# EAGLE board project121 (EAGLE 6.5.0)
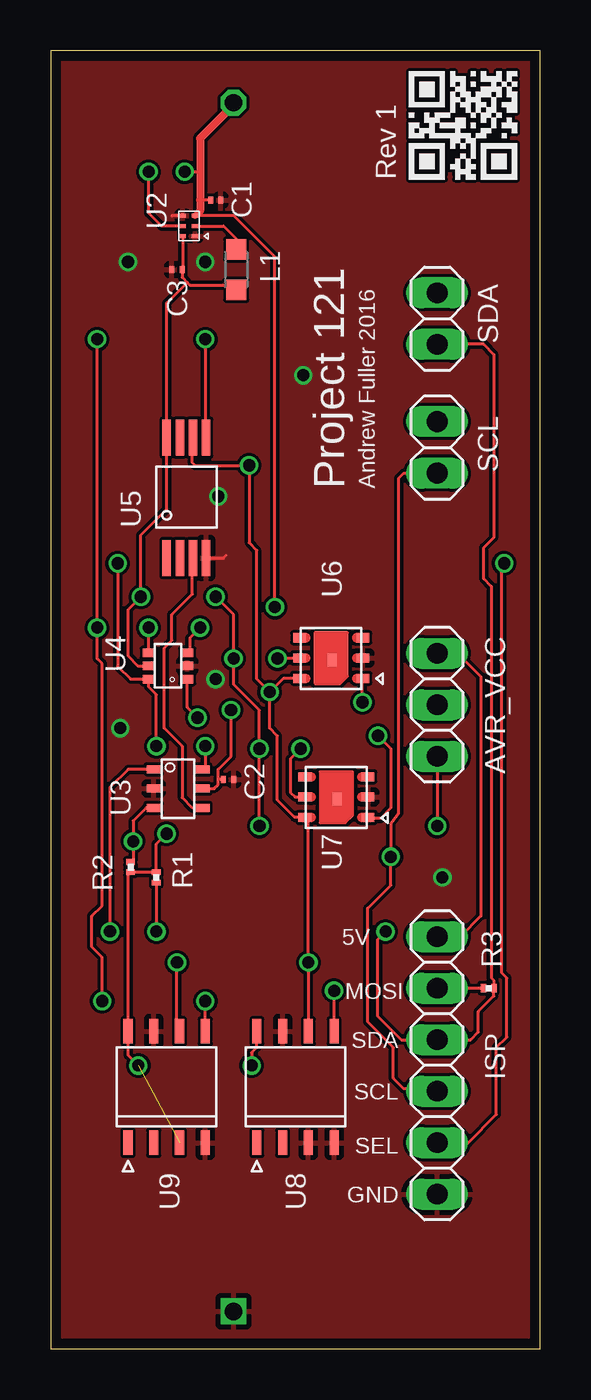
[diagram p0: board, top side]
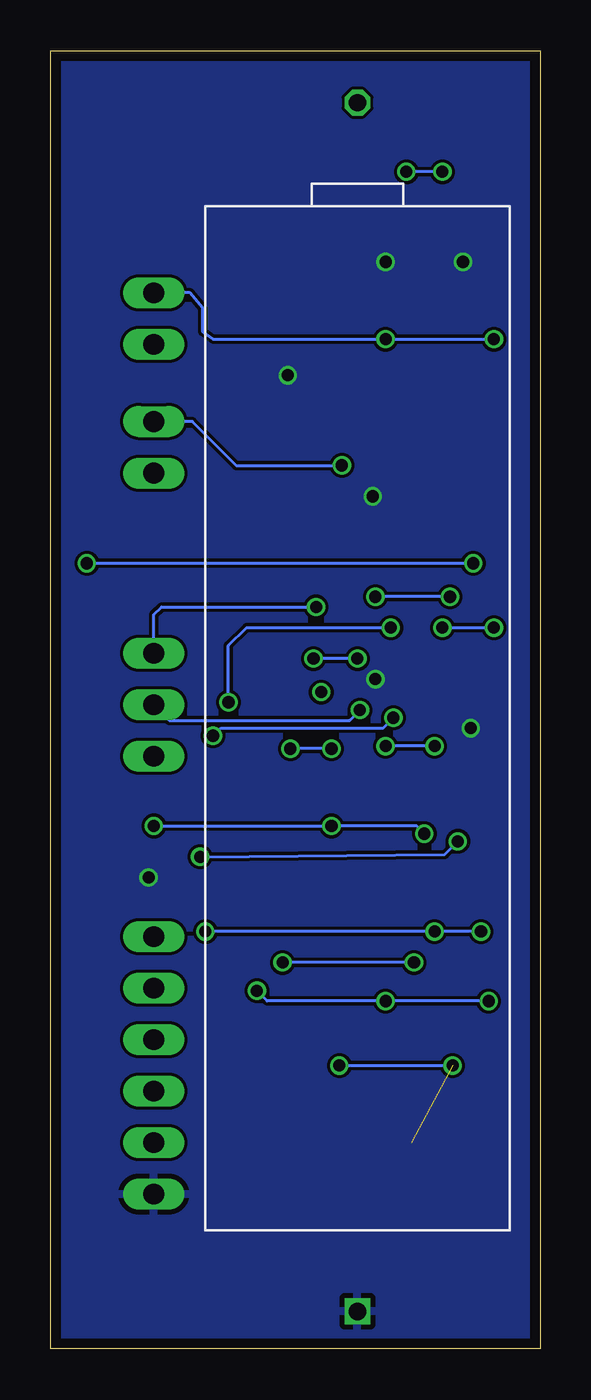
[diagram p1: board, bottom side, seen from below]

Size 24.13 x 64.01 mm. Coordinates in mm from the lower left corner, seen from the top.
Outline: 0,0 24.13,0 24.13,64.01 0,64.01 0,0
Copper layers (1*16): Top 0.035mm / dielectric 1.6mm / Bottom 0.035mm
Design rules "Elecrow_2-layer_PCB_eagle_rule": minimum track width 6mil, minimum drill 12mil, track to track 6mil, track to pad 6mil, pad to pad 6mil, via to via 8mil, smd to smd 0mil, copper to edge 20mil, drill to drill 10mil, minimum pad ring 6mil, minimum via ring 6mil, stop-mask expansion 0mil, vias tented up to drill 100mil, thermal gap 10mil

## Footprints (pad centres in the part's own frame; a part is rotated, then mirrored left to right if it is on the bottom)
1X03 = drill 1.016 long: 1 -2.54,0; 2 0,0; 3 2.54,0
C0201 = smd 0.25 x 0.35: 1 -0.25,0; 2 0.25,0
1X06 = drill 1.016 long: 1 -6.35,0; 2 -3.81,0; 3 -1.27,0; 4 1.27,0; 5 3.81,0; 6 6.35,0
L2012C = smd 1 x 1: 1 -1,0; 2 1,0
R0201 = smd 0.28 x 0.43: 1 -0.255,0; 2 0.255,0
1X02 = drill 1.016 long: 1 -1.27,0; 2 1.27,0
TPS62230DRYT = smd 0.2 x 0.3: EN 0.5,0.6; FB 0,0.6; GND 1,0.6; MODE 0,0; SW 0.5,0; VIN 1,0
ATTINY4 = smd 0.7 x 0.4: GND 0,0.95; PB0 0,1.9; PB1 0,0; PB2 2.4,0; PB3 2.4,1.9; VCC 2.4,0.95
74LVC1G3157 = smd 0.42 x 0.6: A 1.3,1.9; B0 1.3,0; B1 0,0; GND 0.65,0; S 0,1.9; VCC 0.65,1.9
PCA8565TS = smd 0.42 x 1.78: /INT 0.665,-2.92; CLKOUT 0.015,3.02; OSCI -0.635,-2.92; OSCO 0.015,-2.92; SCL 0.665,3.02; SDA 1.315,3.02; VDD -0.635,3.02; VSS 1.315,-2.92
SI7051-A20-IM = smd 0.625 x 0.45: GND -1.673,0.23; NC@3 -1.673,-0.77; NC@4 1.452,-0.77; SCL 1.452,1.23; SDA -1.673,1.23; VDD 1.452,0.23 | smd 0.45 x 0.625: PAD -0.16,0.33
M24M02-A124 = smd 1.2 x 0.45: E2 0,1.27; NC@1 0,3.81; NC@2 0,2.54; SCL 5.5,1.27; SDA 5.5,0; VCC 5.5,3.81; VSS 0,0; WC 5.5,2.54
TLH-5903/P = drill 0.85 octagon: ANODE 7.5,55.6 | drill 0.85 square: CATHODE 7.5,-4

## Placement (x,y rotation side)
AVR_VCC  [1X03]  19.05,31.75 270 top
C1  2.2uF  [C0201]  8.13,56.64 0 top
C2  1uF  [C0201]  8.76,28.07 0 top
C3  2.2uF  [C0201]  6.22,53.21 180 top
ISP  [1X06]  19.05,13.97 270 top
L1  2.2uH  [L2012C]  9.14,53.21 270 top
R1  2.2k  [R0201]  5.21,23.24 90 top
R2  2.2k  [R0201]  3.94,23.75 270 top
R3  2.2k  [R0201]  21.59,17.78 0 top
SCL  [1X02]  19.05,44.45 90 top
SDA  [1X02]  19.05,50.8 90 top
U2  TPS62230DRYT  [TPS62230DRYT]  7.11,54.86 90 top
U3  ATTINY4  [ATTINY4]  5.08,26.67 0 top
U4  74LVC1G3157  [74LVC1G3157]  6.73,33.02 90 top
U5  PCA8565TS  [PCA8565TS]  6.35,41.91 0 top
U6  SI7051-A20-IM  [SI7051-A20-IM]  13.72,34.29 180 top
U7  SI7051-A20-IM  [SI7051-A20-IM]  13.97,27.43 180 top
U8  M24M02-A125  [M24M02-A124]  13.97,10.16 90 top
U9  M24M02-A125  [M24M02-A124]  7.62,10.16 90 top
U$1  TLH-5903/P  [TLH-5903/P]  16.51,5.84 0 bottom

## Library data of the parts
AVR_VCC ISP SCL SDA = pinhead
C1-C3 L1 R1-R3 = rcl
U2-U9 U$1 = project121

## Nets
GND: C1.2 C2.2 C3.2 ISP.6 U2.GND U2.MODE U3.GND U4.GND U5.VSS U6.GND U7.GND U8.E2 U8.VSS U8.WC U9.VSS U9.WC U$1.CATHODE
INT: U3.PB2 U5./INT
MOSI: ISP.2 R3.1
N$2: L1.1 U2.SW
SCL: SCL.2 U5.SCL U6.SCL U7.SCL U8.SCL U9.SCL
SCL_PRG: ISP.4 R2.1 SCL.1 U3.PB1
SDA: SDA.2 U4.A U5.SDA U8.SDA U9.SDA
SDA0: U4.B0 U6.SDA
SDA1: U4.B1 U7.SDA
SDA_PRG: ISP.3 R1.1 R3.2 SDA.1 U3.PB0
SDA_SEL: ISP.5 U3.PB3 U4.S
VCC_2V5: AVR_VCC.3 C3.1 L1.2 R1.2 R2.2 U2.FB U4.VCC U5.VDD U6.VDD U7.VDD U8.VCC U9.E2 U9.VCC
VCC_5V: AVR_VCC.1 C1.1 ISP.1 U2.EN U2.VIN U$1.ANODE
VCC_ATTINY: AVR_VCC.2 C2.1 U3.VCC

## Tracks (layer width: path | path; a pad name or v marks a point on that pad's centre or on a via)
GND  (via drill 0.6)
  Top 0.152: U5.VSS 8.51,38.99 8.64,39.12 | U2.GND 5.99,55.86 5.97,55.88
  other vias: 8.13,33.02 19.3,23.24 3.43,30.61 7.62,53.59 8.26,42.04 3.81,53.59 12.45,48.01
  pour Bottom: 0,64.01 0,0 24.13,0 24.13,64.01
  pour Top: 0,64.01 0,0 24.13,0 24.13,64.01
INT
  Top 0.152: 6.86,38.83 6.99,38.96 | U3.PB2 6.99,26.67 6.48,27.18 6.48,29.72 5.59,30.61 5.59,34.54 5.97,34.92 5.97,36.2 6.99,37.21 6.99,38.96 | 6.99,38.96 U5./INT
MOSI
  Top 0.152: R3.1 ISP.2
N$2
  Top 0.152: 7.12,55.37 U2.SW 8.52,55.36 9.14,54.74 L1.1
SCL  (via drill 0.6)
  Top 0.152: U9.SCL 6.22,15.79 v6.22,19.05 | U8.SCL v12.7,19.05 12.7,26.02 U7.SCL 12.03,26.2 11.18,27.05 11.18,30.23 10.79,30.61 v10.79,32.38 | 7.11,44.83 U5.SCL | 6.99,44.96 U5.SCL | U5.SCL 6.99,44.9 6.99,43.69 7.11,43.56 v9.78,43.56 9.78,39.75 10.16,39.37 10.16,33.02 v10.79,32.38 | U6.SCL 11.47,33.06 v10.79,32.38
  Bottom 0.152: v6.22,19.05 v12.7,19.05 | v9.78,43.56 14.99,43.56 17.14,45.72 SCL.2
SCL_PRG  (via drill 0.6)
  Top 0.152: U3.PB1 4.7,26.67 4.06,26.04 v4.06,25.02 4.06,24.13 R2.1 | ISP.4 18.92,12.83 17.4,12.83 16.89,13.34 16.89,14.86 15.62,16.13 15.62,21.72 16.76,22.86 v16.76,24.26 16.76,25.91 17.14,26.42 17.14,42.93 17.4,43.18 SCL.1
  Bottom 0.152: v4.06,25.02 4.7,24.38 v16.76,24.26
SDA  (via drill 0.6)
  Top 0.152: U9.SDA v7.62,17.14 | U8.SDA v13.97,17.65 | v2.29,49.78 v2.29,35.56 2.29,34.04 2.54,33.78 2.54,21.84 2.03,21.34 2.03,19.81 2.54,19.3 v2.54,17.14 | U4.A 4.83,35.43 v4.83,35.56 | v7.62,49.78 7.62,44.98 U5.SDA
  Bottom 0.152: v2.54,17.14 v7.62,17.14 13.46,17.14 v13.97,17.65 | v4.83,35.56 v2.29,35.56 | v2.29,49.78 v7.62,49.78 16.13,49.78 16.64,50.16 16.64,51.31 17.27,52.07 SDA.2
SDA0  (via drill 0.6)
  Top 0.152: 6.83,34.42 U4.B0 6.86,34.45 6.86,35.05 v7.37,35.56 | v15.37,31.88 15.37,33.04 U6.SDA
  Bottom 0.152: v15.37,31.88 15.37,34.67 14.48,35.56 v7.37,35.56
SDA1  (via drill 0.6)
  Top 0.152: 6.86,32.89 U4.B1 6.73,31.62 v7.24,31.11 | U7.SDA 15.68,26.16 16.26,26.16 16.76,26.67 16.76,29.59 v16.13,30.23
  Bottom 0.152: v16.13,30.23 15.75,30.61 7.75,30.61 v7.24,31.11
SDA_PRG  (via drill 0.6)
  Top 0.152: U3.PB0 3.81,28.57 2.92,27.69 v2.92,20.57 | R3.2 | R3.2 21.84,18.16 21.72,18.29 21.72,37.59 21.34,37.97 21.34,39.5 21.84,40.01 21.84,49.02 21.34,49.53 SDA.1 | R1.1 v5.21,20.57 | R3.2 21.84,17.4 21.08,16.64 21.08,15.62 20.7,15.24 ISP.3 17.27,15.24 16.13,16.38 16.13,20.19 v16.51,20.57
  Bottom 0.152: v16.51,20.57 v5.21,20.57 v2.92,20.57
SDA_SEL  (via drill 0.6)
  Top 0.152: ISP.5 20.57,10.16 21.97,11.56 21.97,14.86 22.48,15.37 22.48,18.29 22.23,18.54 22.23,38.61 v22.35,38.73 | v7.62,29.72 7.62,28.71 U3.PB3 | v3.3,38.73 3.3,33.66 3.94,33.02 U4.S 4.83,32.63 5.21,32.26 v5.21,29.72
  Bottom 0.152: v5.21,29.72 v7.62,29.72 | v22.35,38.73 v3.3,38.73
VCC_2V5  (via drill 0.6)  (1 unrouted)
  Top 0.152: U9.VCC 3.94,15.53 | U9.VCC 3.81,23.37 R2.2 R1.2 5.21,24.89 v5.71,25.4 | v8.13,37.08 9.02,36.2 v9.02,34.04 9.02,32.77 10.29,31.5 v10.29,29.59 v10.29,25.78 | v9.91,13.97 9.91,14.61 10.16,14.86 U8.VCC | U9.VCC 3.81,14.48 v4.32,13.97 | AVR_VCC.3 v19.05,25.78 | 8.76,52.47 L1.2 | U2.FB 6.51,53.25 C3.1 6.47,52.84 6.73,52.58 | 12.41,27.3 U7.VDD 12.04,27.2 11.81,27.43 11.81,29.08 v12.32,29.59 | 8.62,52.58 L1.2 | 6.73,52.58 6.86,52.45 8.49,52.45 L1.2 | 6.73,52.58 5.71,51.56 U5.VDD 5.71,41.4 4.45,40.13 v4.45,37.08 3.81,36.45 3.81,34.16 4.32,33.66 4.82,33.66 U4.VCC | U6.VDD 12.24,34.04 v11.18,34.04
  Bottom 0.152: v9.91,13.97 v4.32,13.97 | v4.45,37.08 v8.13,37.08 | v19.05,25.78 v10.29,25.78 6.1,25.78 v5.71,25.4 | v10.29,29.59 v12.32,29.59 | v9.02,34.04 v11.18,34.04
VCC_5V  (via drill 0.6)
  Top 0.152: U2.VIN 7.1,55.86 | AVR_VCC.1 20.07,34.29 21.21,33.15 21.21,21.34 20.19,20.32 ISP.1 | U2.VIN 7.11,55.88 | C1.1 7.37,56.64 | U2.VIN 7.13,55.88 9.02,55.88 11.05,53.85 v11.05,36.58 | U2.EN 5.47,55.36 4.83,56.01 v4.83,58.04 | v6.6,58.04 7.37,58.04
  Top 0.305: 7.37,56.12 U2.VIN
  Top 0.406: 7.37,56.12 7.37,56.64 7.37,58.04 7.37,59.69 9.01,61.33 U$1.ANODE
  Bottom 0.152: v11.05,36.58 18.67,36.58 19.05,36.2 AVR_VCC.1 | v4.83,58.04 v6.6,58.04
VCC_ATTINY  (via drill 0.6)
  Top 0.152: 7.41,27.69 U3.VCC 8.06,27.62 8.26,27.81 8.26,28.07 | 8.26,28.07 8.26,28.57 8.89,29.21 v8.89,31.5 | C2.1 8.26,28.07
  Bottom 0.152: AVR_VCC.2 18.29,30.99 9.4,30.99 v8.89,31.5
(copper drawn outside any net)
  shapes: Top area x232

## Text on the board
tPlace: Rev 1
tNames: Project 121 | Andrew Fuller 2016 | 5V | MOSI | SDA | SCL | SEL | GND